# Altium PCB MACH_NGUON_UPDATE.PcbDoc
Units mm, origin at the board's own origin, x right, y up, seen from the top; angles counter-clockwise.
Board outline 103.7 x 77.9 mm, 2 copper layers (Top Layer, Bottom Layer); 62 components, 15 nets, 142 pads, 8 vias.
Unrouted connection lines stored in the file: 3.
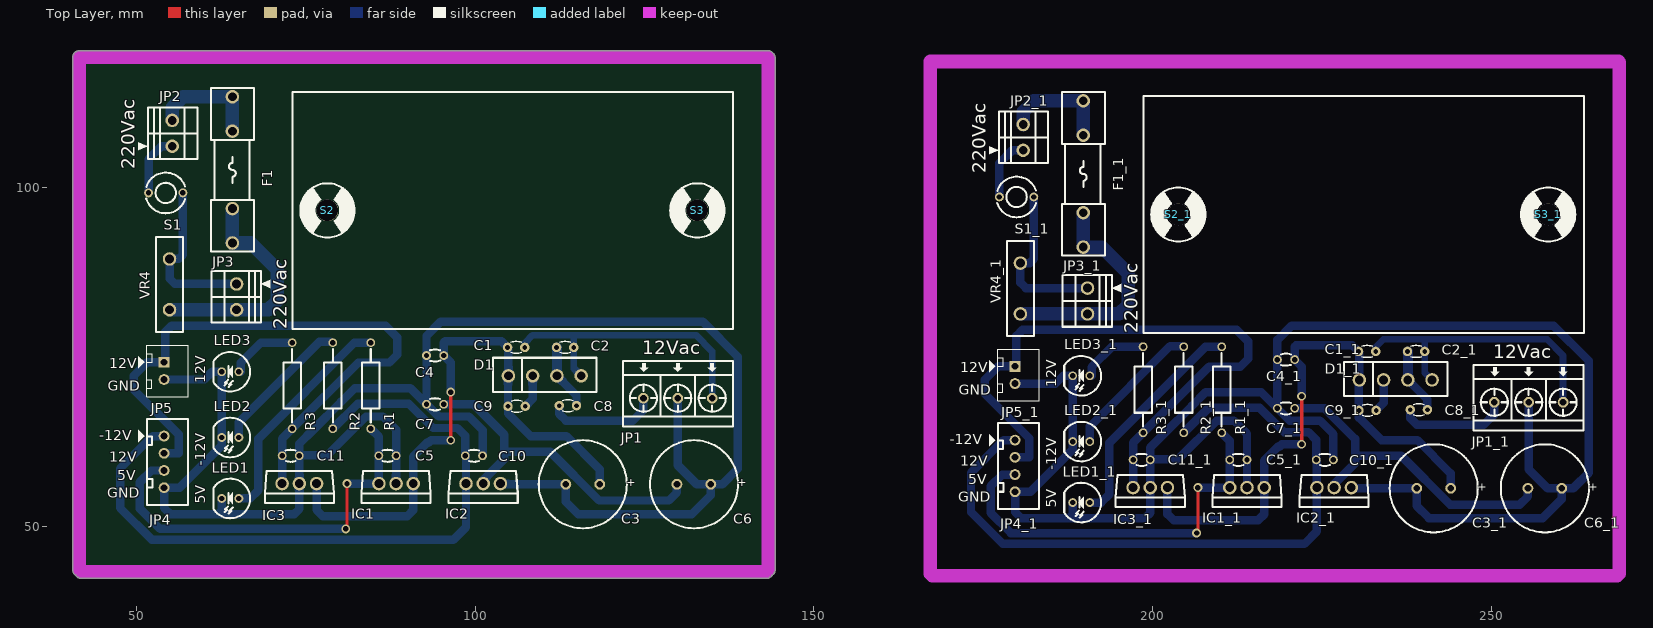
[diagram p0: Top Layer view]
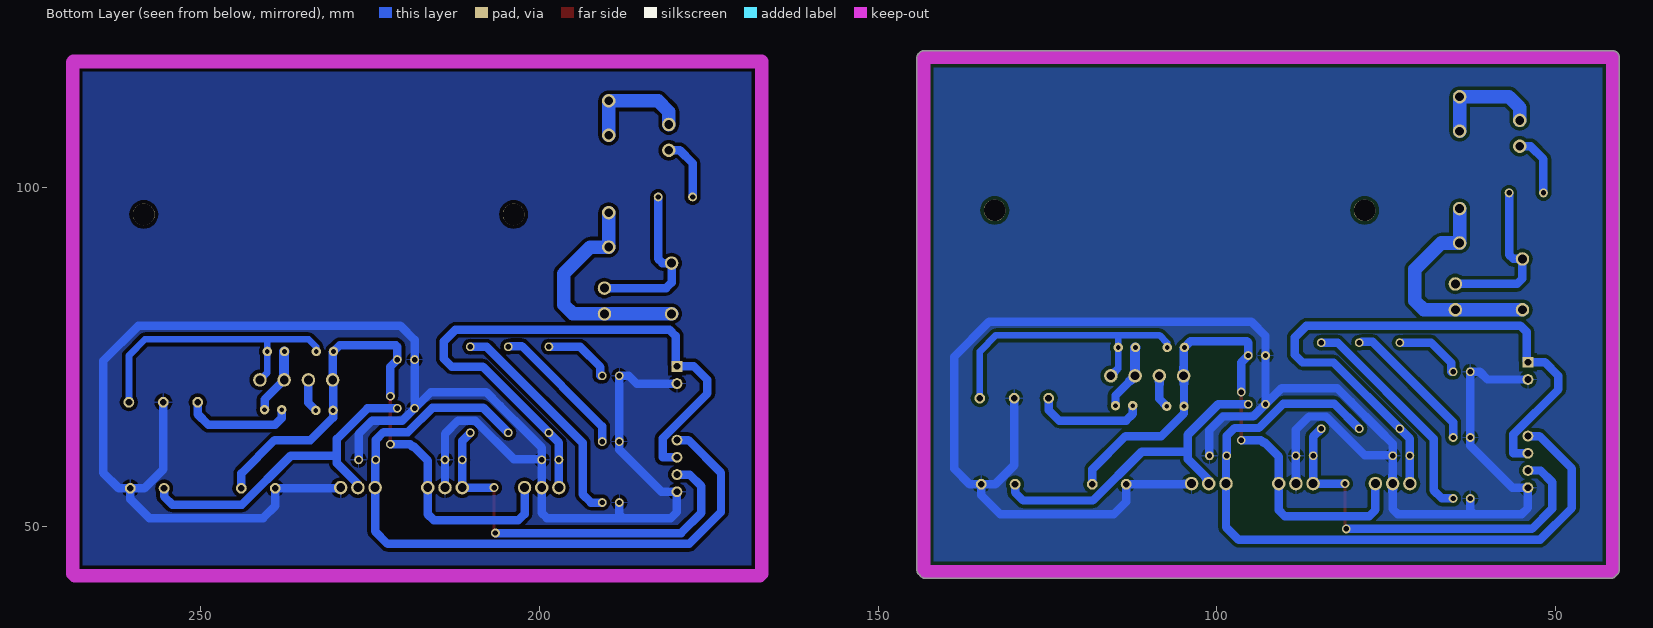
[diagram p1: Bottom Layer view, seen from below]

## Layer stack, top to bottom
Top Solder: solder mask 0.0102, Solder Resist, Dk 3.5
Top Layer: signal copper 0.0356
Dielectric 1: dielectric 0.32, FR-4, Dk 4.8
Bottom Layer: signal copper 0.0356
Bottom Solder: solder mask 0.0102, Solder Resist, Dk 3.5

## Board outline
41.059,42.759 cw(c41.6,43.6) 40.6,43.6 40.6,119.2 cw(c41.6,119.2) 41.6,120.2 143.2,120.2 cw(c143.2,119.2) 143.956,119.856 cw(c143.3,119.1) 144.3,119.1 144.3,43.6 cw(c143.3,43.6) 143.841,42.759 cw(c143,43.3) 143,42.3 41.9,42.3 cw(c41.9,43.3)

## Design rules (kind name [scope] priority, off if disabled: settings)
Clearance [All] p1: gap=0.5 ignorepadtopadclearanceinfootprint=FALSE
PolygonConnect [All] p1: connectstyle=Relief reliefconductorwidth=0.254 reliefentries=4 polygonreliefangle="90 Angle" airgapwidth=0.5
RoomDefinition MACH_NGUON [InComponentClass('MACH_NGUON')] p1: confinementstyle=ConfineIn formatcopy=TRUE lockcomponents=FALSE outline 178.943,26.797 399.161,26.797 399.161,54.229 178.943,54.229
RoutingVias [All] p1: holewidth=0.711 width=1.27 viastyle="Through Hole" minholewidth=0.711 minwidth=1.27 maxholewidth=0.711 maxwidth=1.27
SolderMaskExpansion [All] p1: expansion=0.102
Width [All] p1: maxlimit=2 minlimit=0.5 preferedwidth=0.5
30 further rules are at their usual default settings.

## Classes and differential pairs
component class MACH_NGUON: C1 C2 C4 C5 C6 C7 C8 C9 C10 C11 D1 F1 IC1 IC2 IC3 JP1 JP2 JP3 JP4 JP5 LED1 LED2 LED3 R1 R2 R3 S1 S2 S3 VR4

## Components (designator, comment, footprint, x,y, rotation, side; value= is the part's Value field where it differs from the comment)
C1 "5AK102KABAA" CAPNTO2.54-3.05x1.78A 106.07,76.4 r180 top value=203
C1_1 "5AK102KABAA" CAPNTO2.54-3.05x1.78A 231.67,75.8 r180 top value=203 (schematic designator C1)
C2 "5AK102KABAA" CAPNTO2.54-3.05x1.78A 113.3,76.4 r0 top value=203
C2_1 "5AK102KABAA" CAPNTO2.54-3.05x1.78A 238.9,75.8 r0 top value=203 (schematic designator C2)
C3 "2200UF" CAP_2200UF_25V 118.4,56.2 r180 top value=10uF/50V
C3_1 "2200UF" CAP_2200UF_25V 244,55.6 r180 top value=10uF/50V (schematic designator C3)
C4 "5AK102KABAA" "Tu gom 104" 94.1,75.2 r0 top value=104
C4_1 "5AK102KABAA" "Tu gom 104" 219.7,74.6 r0 top value=104 (schematic designator C4)
C5 "5AK102KABAA" "Tu gom 104" 87.07,60.4 r180 top value=104
C5_1 "5AK102KABAA" "Tu gom 104" 212.67,59.8 r180 top value=104 (schematic designator C5)
C6 "2200UF" CAP_2200UF_25V 134.8,56.2 r180 top value=10uF/50V
C6_1 "2200UF" CAP_2200UF_25V 260.4,55.6 r180 top value=10uF/50V (schematic designator C6)
C7 "5AK102KABAA" "Tu gom 104" 94.1,68 r180 top value=104
C7_1 "5AK102KABAA" "Tu gom 104" 219.7,67.4 r180 top value=104 (schematic designator C7)
C8 "5AK102KABAA" CAPNTO2.54-3.05x1.78A 113.7,67.8 r0 top value=203
C8_1 "5AK102KABAA" CAPNTO2.54-3.05x1.78A 239.3,67.2 r0 top value=203 (schematic designator C8)
C9 "5AK102KABAA" CAPNTO2.54-3.05x1.78A 106.13,67.7 r180 top value=203
C9_1 "5AK102KABAA" CAPNTO2.54-3.05x1.78A 231.73,67.1 r180 top value=203 (schematic designator C9)
C10 "5AK102KABAA" "Tu gom 104" 99.83,60.4 r180 top value=104
C10_1 "5AK102KABAA" "Tu gom 104" 225.43,59.8 r180 top value=104 (schematic designator C10)
C11 "5AK102KABAA" "Tu gom 104" 72.79,60.4 r180 top value=104
C11_1 "5AK102KABAA" "Tu gom 104" 198.39,59.8 r180 top value=104 (schematic designator C11)
D1 "Bridge1" "BRIDGE DIODE 2A" 110.29,72.33 r0 top
D1_1 "Bridge1" "BRIDGE DIODE 2A" 235.89,71.73 r0 top (schematic designator D1)
F1 "F1A" FUSE2_5A 64.175,102.6 r270 top value=Fuse
F1_1 "F1A" FUSE2_5A 189.775,102 r270 top value=Fuse (schematic designator F1)
IC1 "LM7805" LM7805 88.34,56.3 r180 top
IC1_1 "LM7805" LM7805 213.94,55.7 r180 top (schematic designator IC1)
IC2 "LM7912" LM7805 101.2,56.3 r180 top value=LM7905
IC2_1 "LM7912" LM7805 226.8,55.7 r180 top value=LM7905 (schematic designator IC2)
IC3 "LM7812" LM7805 74.06,56.3 r180 top value=LM7805
IC3_1 "LM7812" LM7805 199.66,55.7 r180 top value=LM7805 (schematic designator IC3)
JP1 "ED2610-ND" DOMINO_OSTTC_3P 129.92,68.9 r0 top value="Connector 3"
JP1_1 "ED2610-ND" DOMINO_OSTTC_3P 255.52,68.3 r0 top value="Connector 3" (schematic designator JP1)
JP2 "220Vac" DOMINO-MKDS-2-PIN 55.3,106.09 r90 top value="Connector 2"
JP2_1 "220Vac" DOMINO-MKDS-2-PIN 180.9,105.49 r90 top value="Connector 2" (schematic designator JP2)
JP3 "220Vac" DOMINO-MKDS-2-PIN 64.8,85.76 r270 top value="Connector 2"
JP3_1 "220Vac" DOMINO-MKDS-2-PIN 190.4,85.16 r270 top value="Connector 2" (schematic designator JP3)
JP4 "JP4" CON4 54.097,59.5 r270 top value="Connector 4"
JP4_1 "JP4" CON4 179.697,58.9 r270 top value="Connector 4" (schematic designator JP4)
JP5 "JP2" CON2 54.097,74.2 r270 top value="Connector 2"
JP5_1 "JP2" CON2 179.697,73.6 r270 top value="Connector 2" (schematic designator JP5)
LED1 "RED LED 5mm" LED5R 65.14,54.1 r180 top
LED1_1 "RED LED 5mm" LED5R 190.74,53.5 r180 top (schematic designator LED1)
LED2 "RED LED 5mm" LED5R 65.14,63.1 r180 top
LED2_1 "RED LED 5mm" LED5R 190.74,62.5 r180 top (schematic designator LED2)
LED3 "RED LED 5mm" LED5R 65.14,72.8 r180 top
LED3_1 "RED LED 5mm" LED5R 190.74,72.2 r180 top (schematic designator LED3)
R1 "1k" "RES 1/4W CFR25" 84.6,77.1 r270 top
R1_1 "1k" "RES 1/4W CFR25" 210.2,76.5 r270 top (schematic designator R1)
R2 "1k" "RES 1/4W CFR25" 79,77.1 r270 top
R2_1 "1k" "RES 1/4W CFR25" 204.6,76.5 r270 top (schematic designator R2)
R3 "1k" "RES 1/4W CFR25" 73,77.1 r270 top
R3_1 "1k" "RES 1/4W CFR25" 198.6,76.5 r270 top (schematic designator R3)
S1 "SW-PB" "BUTTON 2PIN TRON" 51.8,99.2 r0 top
S1_1 "SW-PB" "BUTTON 2PIN TRON" 177.4,98.6 r0 top (schematic designator S1)
S2 "Screw" "Screw 3.0 v2" 78.2,96.62 r90 top
S2_1 "Screw" "Screw 3.0 v2" 203.8,96.02 r90 top (schematic designator S2)
S3 "Screw" "Screw 3.0 v2" 132.8,96.62 r90 top
S3_1 "Screw" "Screw 3.0 v2" 258.4,96.02 r90 top (schematic designator S3)
VR4 "Res Varistor" VARISTOR 54.9,85.7 r90 top (schematic designator R4)
VR4_1 "Res Varistor" VARISTOR 180.5,85.1 r90 top (schematic designator R4)

## Footprints (in the part's own frame and the unit in brackets; to place one, negate y for a bottom-side part, rotate by r counter-clockwise, add the part's x,y. Pads: shape width x height; smd on the part's side, far side on the other; paste and mask are expansions set on the pad)
"BRIDGE DIODE 2A" [mm] "KBP206 bridge diode 2A"
  round 2 hole 1.3 mask+0.1: 1(-5.37,-0.13) 2(-1.79,-0.13) 3(1.79,-0.13) 4(5.37,-0.13)
  silkscreen extent -7.62,-2.54 7.62,2.54
"BUTTON 2PIN TRON" [mm] "PIN TO PIN 5.08, W=6MM"
  round 1.3 hole 0.8: 1(0,0) 2(5.08,0)
  silkscreen extent -0.33,-3 5.4,3
CAP_2200UF_25V [mm] "Capacitor, Electrolytic, Radial; Body 12.5 x 25 mm (Dia.xH typ); Pin Spacing 5 mm (typ)"
  round 1.6 hole 1: 1(0,0) 2(5,0)
  silkscreen extent -4,-6.5 9,6.5
CAPNTO2.54-3.05x1.78A [mm] "Capacitor, Radial, Tantalum, Non-Polarised; Body 3.05 x 1.78 x 3.43 mm (WxTxH max); Pin Spacing 2.54 mm (typ)"
  round 1.4 hole 0.7: 1(-1.27,0) 2(1.27,0)
  silkscreen extent -0.8,-0.89 0.8,0.89, body extent -2.92,-0.85 2.92,0.85, height 6.42
CON2 [mm] "CON2"
  rect 1.6x1.6 hole 1 mask+0.1: 1(0,0)
  round 1.6 hole 1 mask+0.1: 2(2.54,0)
  silkscreen extent -2.54,-3.8 5.08,3.56, body extent -1.73,-1.78 4.27,2.72, height 6
CON4 [mm] "CON4"
  round 1.6 hole 1 mask+0.1: 1(-3.81,0) 2(-1.27,0) 3(1.27,0) 4(3.81,0)
  silkscreen extent -6.35,-3.8 6.35,3.56, body extent -6.25,-2.29 6.25,3.41, height 7
DOMINO-MKDS-2-PIN [mm] "DOMINO 2 PIN, PIN TO PIN 3.81MM"
  round 2 hole 1.3 mask+0.1: 1(0,0) 2(3.81,0)
  silkscreen extent -1.9,-3.7 5.71,5, body extent -1.91,-3.7 5.71,3.6, height 8.5
DOMINO_OSTTC_3P [mm] "15A PIN TO PIN 5.08MM ED2610-ND"
  round 1.6 hole 1 mask+0.1: 1(-5.08,0) 2(0,0) 3(5.08,0)
  silkscreen extent -8.12,-4.2 8.12,5.5, body extent -7.96,-3.75 7.88,5.25, height 12.5
FUSE2_5A [mm] "Fuse 2.5A  250V"
  round 2 hole 1.3: 1(-10.795,0) 1(-5.715,0) 2(5.715,0) 2(10.795,0)
  silkscreen extent -12.06,-3.18 12.06,3.18, body extent -11.3,-3.09 11.4,3.1, height 9.6
LED5R [mm] "LED, RED, 2 LEAD, 5mm"
  round 1.3 hole 0.8: 1(0,0) 2(2.54,0)
  silkscreen extent -1.65,-2.92 3.77,2.92, body extent -1.71,-3.01 3.71,3.01, height 12.31
LM7805 [mm] "POWER IC 7805"
  round 2 hole 1.3: 1(-2.54,0) 2(0,0) 3(2.54,0)
  silkscreen extent -5.1,-1.85 5.1,2.85, body extent -5.56,-1.63 5.65,3.06, height 19.17
"RES 1/4W CFR25" [mm] "Axial Device, Thru-Hole; 2 Leads fi 0.55"
  round 1.3 hole 0.8 mask+0.1: 1(0,0) 2(12.7,0)
  silkscreen extent 0.94,-1.3 11.76,1.3, body extent 0.97,-1.16 11.74,1.16, height 2.93
"Screw 3.0 v2" [mm] "Hole 3.2mm outline 8mm"
  round 3.2 hole 3.2 mask+0.1: 1(0,0)
  silkscreen extent -4,-4 4,4, body extent -2.5,-2.5 2.5,2.5, height 1.73
"Tu gom 104" [mm] "Capacitor, Radial, Tantalum, Non-Polarised; Body 3.05 x 1.78 x 3.43 mm (WxTxH max); Pin Spacing 2.54 mm (typ)"
  round 1.3 hole 0.8: 1(-1.27,0) 2(1.27,0)
  silkscreen extent -0.73,-0.89 0.76,0.89, body extent -2.92,-0.85 2.92,0.85, height 6.42
VARISTOR [mm] "DIP"
  round 2 hole 1.3 mask+0.1: 1(-3.75,0) 1(-3.75,0) 2(3.75,0)
  silkscreen extent -7,-2 7,2, body extent -5.6,-0.95 5.7,0.9, height 16.5

## Part data
C1 C1_1 C2 C2_1 C4 C4_1 C5 C5_1 C7 C7_1 C8 C8_1 C9 C9_1 C10 C10_1 C11 C11_1: "CAP NPO CAPNTO 1nF 100V 10%", ComponentLink1Description=Datasheet, ComponentLink1URL="D:\Dropbox\Datasheets\Passive Components\Capacitors\AVX Disc Ceramic Capacitors.pdf", Unit Price=0.003
C3 C3_1 C6 C6_1: library part CP1, "Cap P  0,1uF < 22uF , 16 - 50V", Description 1="10 => 220uF/6,3V/10V - 10uF => 100uF/16V", Description 2="0,1uF => 33uF/50V - 10uF => 22uF/63V", Description 3="0,47uF => 10uF/100V"
D1 D1_1: "Full Wave Diode Bridge", DatasheetVersion=E2732B, LatestRevisionDate=29-May-2009, LatestRevisionNote="Sch pins A & K swapped.", PackageDescription="Bridge Rectifier; 4 Terminals; Body 9.4 x 9.4 mm (typ); Pitch 5.08 mm", PackageReference=D-38, Published=8-Jun-2000, Publisher="Altium Limited"
F1 F1_1: library part Fuse, "Fuse", Designed by=VanDungEvn
IC1 IC1_1 IC3 IC3_1: library part LM78xx, "On ap +, from + 5 to + 24VDC", =LM7808
IC2 IC2_1: library part LM79xx, "On ap -, from - 5 to - 24VDC", =LM7808
JP1 JP1_1: library part Con3_1, "Connector 3"
JP2 JP2_1 JP3 JP3_1 JP5 JP5_1: library part Con2, "Connector 2"
JP4 JP4_1: library part Con4, "Connector 4"
LED1 LED1_1 LED2 LED2_1 LED3 LED3_1: library part LED_RED_5MM, "LED Red 5mm", Color=Red, Current - Test=10mA, Manufacturer="Broadcom Limited", Manufacturer Part Number=HLMP-3316, Millicandela Rating=60mcd, Package / Case=Radial, Supplier Device Package="T-1 3/4", Supplier Part Number 1=516-1335-ND, Voltage - Forward (Vf) (Typ)=1.9V, BuyLink=http://www.tme.vn/Product.aspx?id=1277#page=pro_info, Category=Optoelectronics, ComponentLink1Description=https://docs.broadcom.com/docs/AV02-1023EN, ComponentLink1URL=https://docs.broadcom.com/docs/AV02-1023EN, Cost (VNÐ)=1000, Features=-, Height (Max)=9.19mm, Lens Color=Red, Lens Style/Size="Round with Domed Top, 5mm (T-1 3/4), 4.83mm", Lens Transparency=Clear, Mounting Type="Through Hole", Packaging=Bulk, Part Status=Active, Pricing 1="1=0.41, 10=0.294, 25=0.24, 100=0.192, 250=0.162, 500=0.138, 1000=0.108, 2500=0.099 (USD)", RoHS="RoHS Compliant", Size / Dimension=-, Stock 1=11943, Supplier 1=Digi-Key, Viewing Angle=35°, Wavelength - Dominant=626nm, Wavelength - Peak=635nm
R1 R1_1 R2 R2_1 R3 R3_1: library part "Tr? 330R 1/4W", "CF14JT330RTR-ND 330R 1/4W", Manufacturer="Stackpole Electronics Inc.", Manufacturer Part Number=CF14JT330R, Operating Temperature="-55°C ~ 155°C", Package / Case=Axial, Power (Watts)="0.25W, 1/4W", Resistance (Ohms)=330, Supplier Part Number 1=CF14JT330RTR-ND, Temperature Coefficient="0/ -400ppm/°C", Tolerance=±5%, BuyLink=http://www.tme.vn/Product.aspx?id=1004#page=pro_info, Category=Resistors, ComponentLink1Description=https://www.seielect.com/Catalog/SEI-CF_CFM.pdf, ComponentLink1URL=https://www.seielect.com/Catalog/SEI-CF_CFM.pdf, Composition="Carbon Film", Cost (VNÐ)=50, Failure Rate=-, Features="Flame Retardant Coating, Safety", Height - Seated (Max)=-, Packaging="Tape & Reel (TR)", Part Status=Active, Pricing 1="5000=0.00475, 10000=0.00413, 25000=0.00363, 50000=0.00333, 125000=0.00326 (USD)", RoHS="RoHS Compliant", Size / Dimension="0.091\" Dia x 0.236\" L (2.30mm x 6.00mm)", Stock 1=240000, Supplier 1=Digi-Key, Supplier Device Package=Axial
S1 S1_1: "Switch", LatestRevisionDate=17-Jul-2002, LatestRevisionNote="Re-released for DXP Platform.", PackageDescription="Switch; 2 Leads", PackageReference=SPST-2, Published=24-Mar-1999, Publisher="Altium Limited"
VR4 VR4_1: "Varistor (Voltage-Sensitive Resistor)", Code_IPC=RESC2012, LatestRevisionDate=29-May-2009, LatestRevisionNote="IPC-7351 Footprint Added.", PackageDescription="Chip Resistor 0805 Case Size", PackageReference=6-0805, PackageVersion=Mar-2003, Published=24-Mar-1999, Publisher="Altium Limited"

## Via types
v1: diameter 1.3, hole 0.8, Top Layer to Bottom Layer, 8 vias

## Nets (pads, with @x,y where several pads share a name; then routed paths per layer and width w, separated by ;. In a path a pad name is that pad's centre, name@x,y a point inside that pad or via, vN(x,y) a via of type N, cw(c..) or ccw(c..) an arc to the next point about the centre after c; other vN are vias at no path point)
5V: C5.2 IC1.3 JP4.3 R1.2 | length 53
  Bottom Layer w1.25: JP4.3 52.23,58.23 50.5,56.5 50.5,52.6 53.5,49.6 v1(80.9,49.6) ; v1@81.3,56.3 IC1.3 C5.2 85.8,63.2 R1.2
  other v1: 81.1,56.3
12V: C11.2 IC3.3 JP4.2 JP5.1 R3.2 | length 92.8
  Bottom Layer w1.25: JP4.2 56.23,60.77 56.23,63.57 49.6,70.2 49.6,72.2 51.6,74.2 JP5.1 54.3,74.403 54.3,78.7 55.2,79.6 86.8,79.6 88.5,77.9 88.5,75.3 87.37,74.17 82.77,74.17 R3.2 71.52,62.92 C11.2 IC3.3
-12V: C10.2 IC2.3 JP4.1 R2.2 | length 104.7
  Bottom Layer w1.25: JP4.1 52.41,63.31 47.6,58.5 47.6,52.7 52.3,48 96.8,48 98.66,49.86 IC2.3 98.66,60.3 C10.2 98.56,63.34 97.4,64.5 93.8,64.5 90.2,68.1 82.7,68.1 R2.2
A: C1.2 C3.1 C4.2 C9.2 D1.1 IC1.1 IC3.1 | length 80
  Bottom Layer w1.25: IC3.1 76.6,52.4 77.5,51.5 90,51.5 90.88,52.38 IC1.1 90.88,60.28 93,62.4 93.1,62.3 93.5,62.7 v1(96.4,62.7) ; v1(96.4,69.8) 96.4,74.17 C4.2 95.37,77.1 95.57,77.3 103.9,77.3 C1.2 104.92,76.28 D1.1 104.86,72.14 C9.2 104.86,66.64 108.19,63.31 113.49,63.31 118.4,58.4 C3.1
B: C2.1 C6.2 C7.1 C8.2 D1.3 IC2.2 | length 59.3
  Bottom Layer w1.25: C7.1 99.8,68 104.3,63.5 104.3,61 ; IC2.2 101.2,56.8 104.3,59.9 104.3,61 ; D1.3 114.97,69.31 C8.2 ; C6.2 129.8,55 128.6,53.8 118.3,53.8 111.1,61 104.3,61
  Bottom Layer w1.5: C2.1 112.08,76.35 D1.3
GND: C3.2 C4.1 C5.1 C6.1 C7.2 C10.1 C11.1 IC1.2 IC2.1 IC3.2 JP1.2 JP4.4 JP5.2 LED1.2 LED2.2 LED3.2 | length 262.7
  Bottom Layer w1.25: JP5.2 60.06,71.66 61.2,72.8 LED3.2 LED2.2 62.6,61.9 56.39,55.69 JP4.4 54.097,52.703 55,51.8 62.1,51.8 ; LED1.2 62.6,52.3 62.1,51.8 ; IC1.2 C5.1 88.34,64.26 86.4,66.2 83.9,66.2 78.2,60.5 74.16,60.5 C11.1 ; C10.1 101.1,64.2 99.1,66.2 94.63,66.2 C7.2 ; IC2.1 103.84,56.2 C3.2 113.4,53.6 115.2,51.8 132,51.8 134.8,54.6 C6.1 ; JP1.2 129.92,59 132.72,56.2 C6.1 ; 62.1,51.8 73.3,51.8 74.06,52.56 IC3.2 C11.1 ; C11.1 74.06,62.203 76.109,64.252 80.208,68.351 82.257,70.4 90.43,70.4 C7.2 ; C7.2 C4.1 92.83,78.1 94.93,80.2 133.6,80.2 138.8,75 138.8,58.5 136.5,56.2 C6.1
NetC1_1: C1.1 C2.2 D1.4 JP1.3 | length 43.2
  Bottom Layer w1: C1.1 107.34,77.04 108.5,78.2 114.4,78.2 ; D1.4 114.57,73.29 C2.2 114.57,78.03 114.4,78.2 ; JP1.3 135,75.8 132.6,78.2 114.4,78.2
NetC8_1: C8.1 C9.1 D1.2 JP1.1 | length 21.4
  Bottom Layer w1.25: C9.1 108.5,68.8 D1.2 ; C8.1 112.43,66.57 113.4,65.6 123.3,65.6 124.84,67.14 JP1.1
NetF1_1: F1.1 JP2.2 | length 16.5
  Bottom Layer w2: JP2.2 55.3,111.8 56.895,113.395 64.175,113.395 F1.1@64.175,108.315
NetF1_2: F1.2 JP3.2 VR4.1 | length 34.4
  Bottom Layer w2: VR4.1@54.9,81.95 JP3.2 69.45,81.95 70.8,83.3 70.8,87.9 66.895,91.805 64.175,91.805 F1.2@64.175,96.885
NetJP2_1: JP2.1 S1.1 | length 9.3
  Bottom Layer w1.25: S1.1 51.8,104.2 53.69,106.09 JP2.1
NetJP3_1: JP3.1 S1.2 VR4.2 | length 24.5
  Bottom Layer w1.25: S1.2 56.88,90.08 56.25,89.45 VR4.2 54.9,86.56 55.7,85.76 JP3.1
NetLED1_1: LED1.1 R1.1 | length 33.4
  Bottom Layer w1.25: LED1.1 66.8,54.1 68,55.3 68,62.9 82.2,77.1 R1.1
NetLED2_1: LED2.1 R2.1 | length 20.6
  Bottom Layer w1.25: LED2.1 65.14,65.34 77,77.2 R2.1@78.6,77.2
NetLED3_1: LED3.1 R3.1 | length 9.6
  Bottom Layer w1.25: LED3.1@65.4,72.8 65.4,74.1 68.4,77.1 R3.1@72.5,77.1
pads on no net: C1_1.1 C1_1.2 C2_1.1 C2_1.2 C3_1.1 C3_1.2 C4_1.1 C4_1.2 C5_1.1 C5_1.2 C6_1.1 C6_1.2 C7_1.1 C7_1.2 C8_1.1 C8_1.2 C9_1.1 C9_1.2 C10_1.1 C10_1.2 C11_1.1 C11_1.2 D1_1.1 D1_1.2 D1_1.3 D1_1.4 F1_1.1 F1_1.2 IC1_1.1 IC1_1.2 IC1_1.3 IC2_1.1 IC2_1.2 IC2_1.3 IC3_1.1 IC3_1.2 IC3_1.3 JP1_1.1 JP1_1.2 JP1_1.3 JP2_1.1 JP2_1.2 JP3_1.1 JP3_1.2 JP4_1.1 JP4_1.2 JP4_1.3 JP4_1.4 JP5_1.1 JP5_1.2 LED1_1.1 LED1_1.2 LED2_1.1 LED2_1.2 LED3_1.1 LED3_1.2 R1_1.1 R1_1.2 R2_1.1 R2_1.2 R3_1.1 R3_1.2 S1_1.1 S1_1.2 S2.1 S2_1.1 S3.1 S3_1.1 VR4_1.1 VR4_1.2
copper on no net: | length 892.6
  Top Layer w0.5: 81.1,49.5 81.1,56.3 ; 96.4,62.7 96.4,69.5 ; v1@206.7,48.9 v1(206.7,55.7) ; v1(222,62.1) v1@222,68.9
  Bottom Layer w1: 232.94,75.8 232.94,76.44 234.1,77.6 240,77.6 ; 241.26,71.6 240.17,72.69 240.17,75.8 240.17,77.43 240,77.6 ; 260.6,68.3 260.6,75.2 258.2,77.6 240,77.6
  Bottom Layer w1.25: 177.4,98.6 177.4,103.6 179.29,105.49 180.9,105.49 ; 179.697,57.63 177.83,57.63 176.1,55.9 176.1,52 179.1,49 v1(206.5,49) ; 179.697,60.17 181.83,60.17 181.83,62.97 175.2,69.6 175.2,71.6 177.2,73.6 179.697,73.6 179.9,73.803 179.9,78.1 180.8,79 212.4,79 214.1,77.3 214.1,74.7 212.97,73.57 208.37,73.57 198.6,63.8 197.12,62.32 197.12,59.8 197.12,55.7 ; 179.697,62.71 178.01,62.71 173.2,57.9 173.2,52.1 177.9,47.4 222.4,47.4 224.26,49.26 224.26,55.7 224.26,59.7 224.16,59.8 224.16,62.74 223,63.9 219.4,63.9 215.8,67.5 208.3,67.5 204.6,63.8 ; 179.697,71.06 185.66,71.06 186.8,72.2 188.2,72.2 188.2,62.5 188.2,61.3 181.99,55.09 179.697,55.09 179.697,52.103 180.6,51.2 187.7,51.2 ; 182.48,98.6 182.48,89.48 181.85,88.85 180.5,88.85 180.5,85.96 181.3,85.16 190.4,85.16 ; 188.2,53.5 188.2,51.7 187.7,51.2 ; 190.74,53.5 192.4,53.5 193.6,54.7 193.6,62.3 207.8,76.5 210.2,76.5 ; 190.74,62.5 190.74,64.74 202.6,76.6 204.2,76.6 ; 191,72.2 191,73.5 194,76.5 198.1,76.5 ; 202.2,55.7 202.2,51.8 203.1,50.9 215.6,50.9 216.48,51.78 216.48,55.7 216.48,59.68 218.6,61.8 218.7,61.7 219.1,62.1 v1(222,62.1) ; v1@206.9,55.7 211.4,55.7 211.4,59.8 211.4,62.6 210.2,63.8 ; 213.94,55.7 213.94,59.8 213.94,63.66 212,65.6 209.5,65.6 203.8,59.9 199.76,59.9 199.66,59.8 ; 220.97,67.4 225.4,67.4 229.9,62.9 229.9,60.4 ; v1(222,69.2) 222,73.57 220.97,74.6 220.97,76.5 221.17,76.7 229.5,76.7 230.4,75.8 230.52,75.68 230.52,71.6 230.46,71.54 230.46,67.1 230.46,66.04 233.79,62.71 239.09,62.71 244,57.8 244,55.6 ; 226.7,59.8 226.7,63.6 224.7,65.6 220.23,65.6 218.43,67.4 ; 226.8,55.7 226.8,56.2 229.9,59.3 229.9,60.4 ; 229.34,55.7 229.44,55.6 239,55.6 239,53 240.8,51.2 257.6,51.2 260.4,54 260.4,55.6 ; 233,67.1 234.1,68.2 234.1,71.6 ; 237.68,71.6 240.57,68.71 240.57,67.2 ; 238.03,67.2 238.03,65.97 239,65 248.9,65 250.44,66.54 250.44,68.3 ; 255.4,55.6 255.4,54.4 254.2,53.2 243.9,53.2 236.7,60.4 229.9,60.4 ; 255.52,68.3 255.52,58.4 258.32,55.6 260.4,55.6 ; 187.7,51.2 198.9,51.2 199.66,51.96 199.66,55.7 199.66,59.8 ; 199.66,59.8 199.66,61.603 201.709,63.652 205.808,67.751 207.857,69.8 216.03,69.8 218.43,67.4 ; 218.43,67.4 218.43,74.6 218.43,77.5 220.53,79.6 259.2,79.6 264.4,74.4 264.4,57.9 262.1,55.6 260.4,55.6
  Bottom Layer w1.5: 237.63,75.8 237.68,75.75 237.68,71.6
  Bottom Layer w2: 180.5,81.35 190.4,81.35 195.05,81.35 196.4,82.7 196.4,87.3 192.495,91.205 189.775,91.205 189.775,96.285 ; 180.9,109.3 180.9,111.2 182.495,112.795 189.775,112.795 189.775,107.715

## Polygon pours and split planes (outlines as drawn)
no net on Bottom Layer "Bottom Layer-GND" (solid, remove dead copper, pour order 8): 167.7,118.6 167.8,118.5 268.9,118.5 268.9,43 268.6,43.3 167.2,43.3 167.2,118.1
GND on Bottom Layer "Bottom Layer-GND" (solid, remove dead copper, pour order 4): 42.1,119.2 42.2,119.1 143.3,119.1 143.3,43.6 143,43.9 41.6,43.9 41.6,118.7

## Keep-outs
Keep-Out Layer:
  lines w2: 41.6,43.6 41.6,119.2 143.2,119.2 143.3,119.1 143.3,43.6 143,43.3 41.9,43.3 41.6,43.6 ; 167.2,43 167.5,42.7 268.6,42.7 268.9,43 268.9,118.5 268.8,118.6 167.2,118.6 167.2,43

## Silkscreen, mask and mechanical layers (free items; w line width, h text height)
Top Overlay:
  lines w0.3: 73.08,79.12 138.08,79.12 138.08,114.12 73.08,114.12 73.08,79.12 ; 198.68,78.52 198.68,113.52 263.68,113.52 263.68,78.52 198.68,78.52
  text "220Vac" at 49.8,102.7 h2 r90
  text "220Vac" at 175.4,102.1 h2 r90
  text "220Vac" at 72.2,79.1 h2 r90
  text "220Vac" at 197.8,78.5 h2 r90
  text "12Vac" at 124.7,75.4 h2
  text "12Vac" at 250.3,74.8 h2
  text "12V" at 46,73.3 h1.52
  text "12V" at 171.6,72.7 h1.52
  text "12V" at 60.2,71.1 h1.52 r90
  text "12V" at 185.8,70.5 h1.52 r90
  text "GND" at 45.8,70 h1.52
  text "GND" at 171.4,69.4 h1.52
  text "-12V" at 44.5,62.7 h1.52
  text "-12V" at 170.1,62.1 h1.52
  text "12V" at 46,59.5 h1.52
  text "-12V" at 60.2,58.9 h1.52 r90
  text "12V" at 171.6,58.9 h1.52
  text "-12V" at 185.8,58.3 h1.52 r90
  text "5V" at 47.2,56.8 h1.52
  text "5V" at 172.8,56.2 h1.52
  text "GND" at 45.7,54.2 h1.52
  text "GND" at 171.3,53.6 h1.52
  text "5V" at 60.2,53.3 h1.52 r90
  text "5V" at 185.8,52.7 h1.52 r90
Mechanical 2:
  lines w0.05: 73.08,79.12 138.08,79.12 138.08,114.12 73.08,114.12 73.08,79.12 ; 198.68,78.52 198.68,113.52 263.68,113.52 263.68,78.52 198.68,78.52
Mechanical 3:
  lines w0.05: 73.08,79.12 138.08,79.12 138.08,114.12 73.08,114.12 73.08,79.12 ; 198.68,78.52 198.68,113.52 263.68,113.52 263.68,78.52 198.68,78.52

## Text inside footprints (layer, text, board x,y; h text height)
C3: Top Overlay "+" at 123.7,56.9 h1.2 r180; Mechanical 1 "+" at 121.3,56.9 h1.5 r180; Mechanical 1 "1" at 118.6,56.8 h1.2 r180; Mechanical 1 "2" at 113.7,56.8 h1.2 r180
C3_1: Top Overlay "+" at 249.3,56.3 h1.2 r180; Mechanical 1 "2" at 239.3,56.2 h1.2 r180; Mechanical 1 "1" at 244.2,56.2 h1.2 r180; Mechanical 1 "+" at 246.9,56.3 h1.5 r180
C6: Top Overlay "+" at 140.1,56.9 h1.2 r180; Mechanical 1 "+" at 137.7,56.9 h1.5 r180; Mechanical 1 "1" at 135,56.8 h1.2 r180; Mechanical 1 "2" at 130.1,56.8 h1.2 r180
C6_1: Top Overlay "+" at 265.7,56.3 h1.2 r180; Mechanical 1 "2" at 255.7,56.2 h1.2 r180; Mechanical 1 "1" at 260.6,56.2 h1.2 r180; Mechanical 1 "+" at 263.3,56.3 h1.5 r180
D1: Mechanical 1 "1" at 104.79,71.63 h1.2; Mechanical 1 "4" at 115.19,71.53 h1.2; Mechanical 1 "+" at 104.59,73.33 h1.2; Mechanical 1 "-" at 115.39,73.23 h1.2; Mechanical 1 "~" at 108.09,72.53 h1.2; Mechanical 1 "~" at 111.79,72.53 h1.2
D1_1: Mechanical 1 "~" at 237.39,71.93 h1.2; Mechanical 1 "~" at 233.69,71.93 h1.2; Mechanical 1 "-" at 240.99,72.63 h1.2; Mechanical 1 "+" at 230.19,72.73 h1.2; Mechanical 1 "4" at 240.79,70.93 h1.2; Mechanical 1 "1" at 230.39,71.03 h1.2
IC1: Mechanical 1 "O" at 86.181,54.776 h1.2 r180; Mechanical 1 "G" at 88.721,54.776 h1.2 r180; Mechanical 1 "I" at 91.007,54.776 h1.2 r180
IC1_1: Mechanical 1 "I" at 216.607,54.176 h1.2 r180; Mechanical 1 "G" at 214.321,54.176 h1.2 r180; Mechanical 1 "O" at 211.781,54.176 h1.2 r180
IC2: Mechanical 1 "I" at 103.867,54.776 h1.2 r180; Mechanical 1 "G" at 101.581,54.776 h1.2 r180; Mechanical 1 "O" at 99.041,54.776 h1.2 r180
IC2_1: Mechanical 1 "O" at 224.641,54.176 h1.2 r180; Mechanical 1 "G" at 227.181,54.176 h1.2 r180; Mechanical 1 "I" at 229.467,54.176 h1.2 r180
IC3: Mechanical 1 "I" at 76.727,54.776 h1.2 r180; Mechanical 1 "G" at 74.441,54.776 h1.2 r180; Mechanical 1 "O" at 71.901,54.776 h1.2 r180
IC3_1: Mechanical 1 "O" at 197.501,54.176 h1.2 r180; Mechanical 1 "G" at 200.041,54.176 h1.2 r180; Mechanical 1 "I" at 202.327,54.176 h1.2 r180
JP1: Mechanical 2 "3" at 134.6,68.3 h1.2; Mechanical 2 "1" at 124.64,68.3 h1.2; Mechanical 2 "2" at 129.52,68.3 h1.2
JP1_1: Mechanical 2 "2" at 255.12,67.7 h1.2; Mechanical 2 "1" at 250.24,67.7 h1.2; Mechanical 2 "3" at 260.2,67.7 h1.2
JP2: Mechanical 1 "2" at 55.7,109.79 h1 r90; Mechanical 1 "1" at 55.7,106.005 h1 r90; Mechanical 1 "CN?" at 55.35,107.995 h1 r90
JP2_1: Mechanical 1 "CN?" at 180.95,107.395 h1 r90; Mechanical 1 "1" at 181.3,105.405 h1 r90; Mechanical 1 "2" at 181.3,109.19 h1 r90
JP3: Mechanical 1 "2" at 64.4,82.06 h1 r270; Mechanical 1 "1" at 64.4,85.845 h1 r270; Mechanical 1 "CN?" at 64.75,83.855 h1 r270
JP3_1: Mechanical 1 "CN?" at 190.35,83.255 h1 r270; Mechanical 1 "1" at 190,85.245 h1 r270; Mechanical 1 "2" at 190,81.46 h1 r270
JP4: Mechanical 2 "1" at 53.597,63.4 h1 r270; Mechanical 2 "4" at 53.597,56.1 h1 r270
JP4_1: Mechanical 2 "4" at 179.197,55.5 h1 r270; Mechanical 2 "1" at 179.197,62.8 h1 r270